# Altium PCB Microcontroller PCB.PcbDoc (part 1 of 2)
Units mm, origin at the board's own origin, x right, y up, seen from the top; angles counter-clockwise.
Board outline 155 x 69 mm, 2 copper layers (Top Layer, Bottom Layer), stack 1.6 mm thick; 87 components, 109 nets, 469 pads, 119 vias.
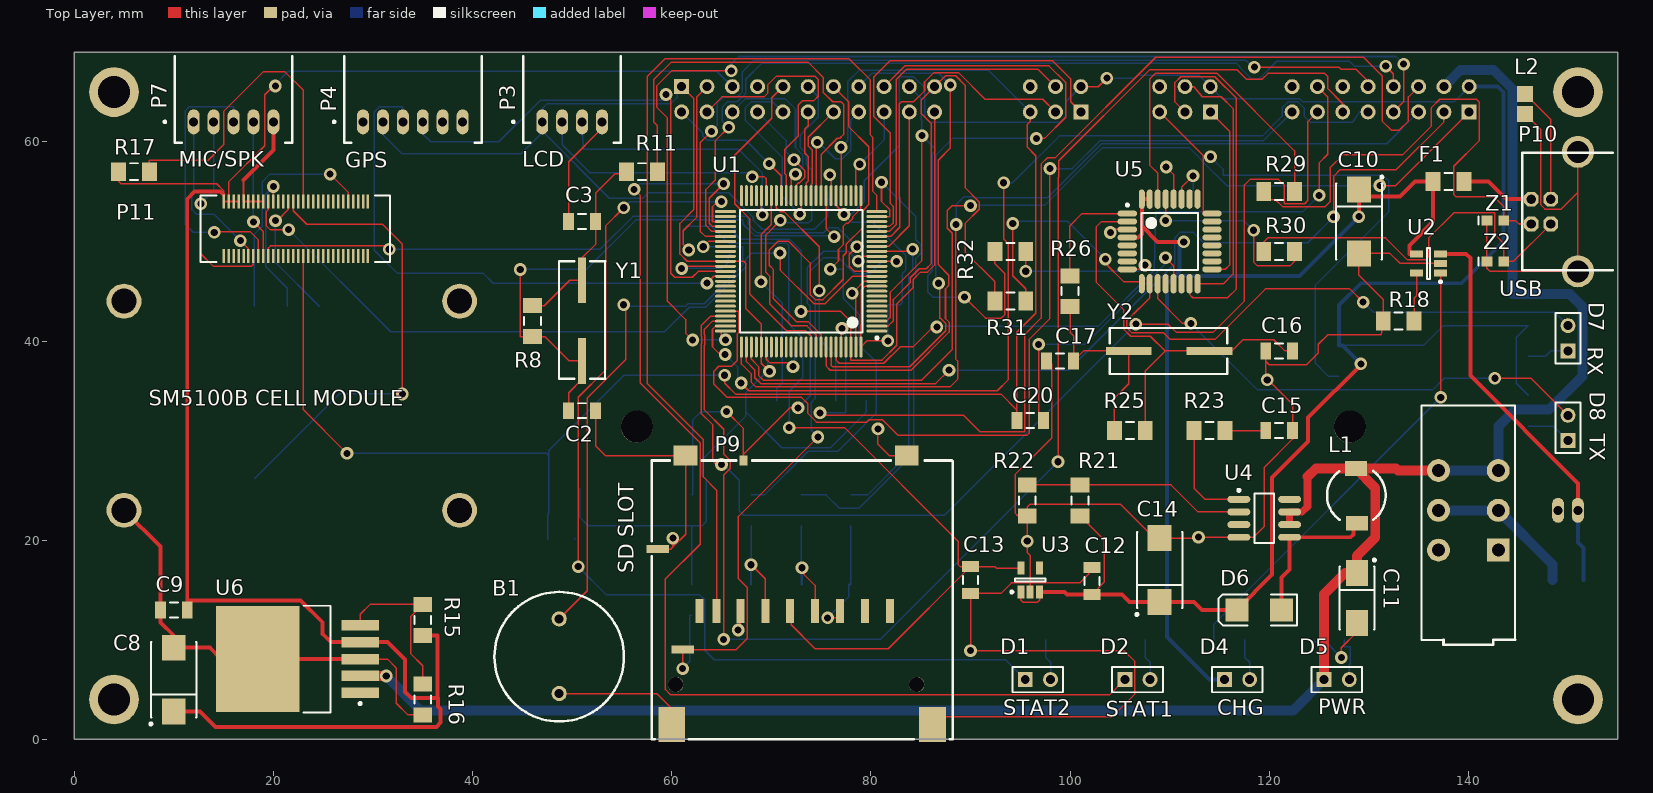
[diagram p0: Top Layer view]
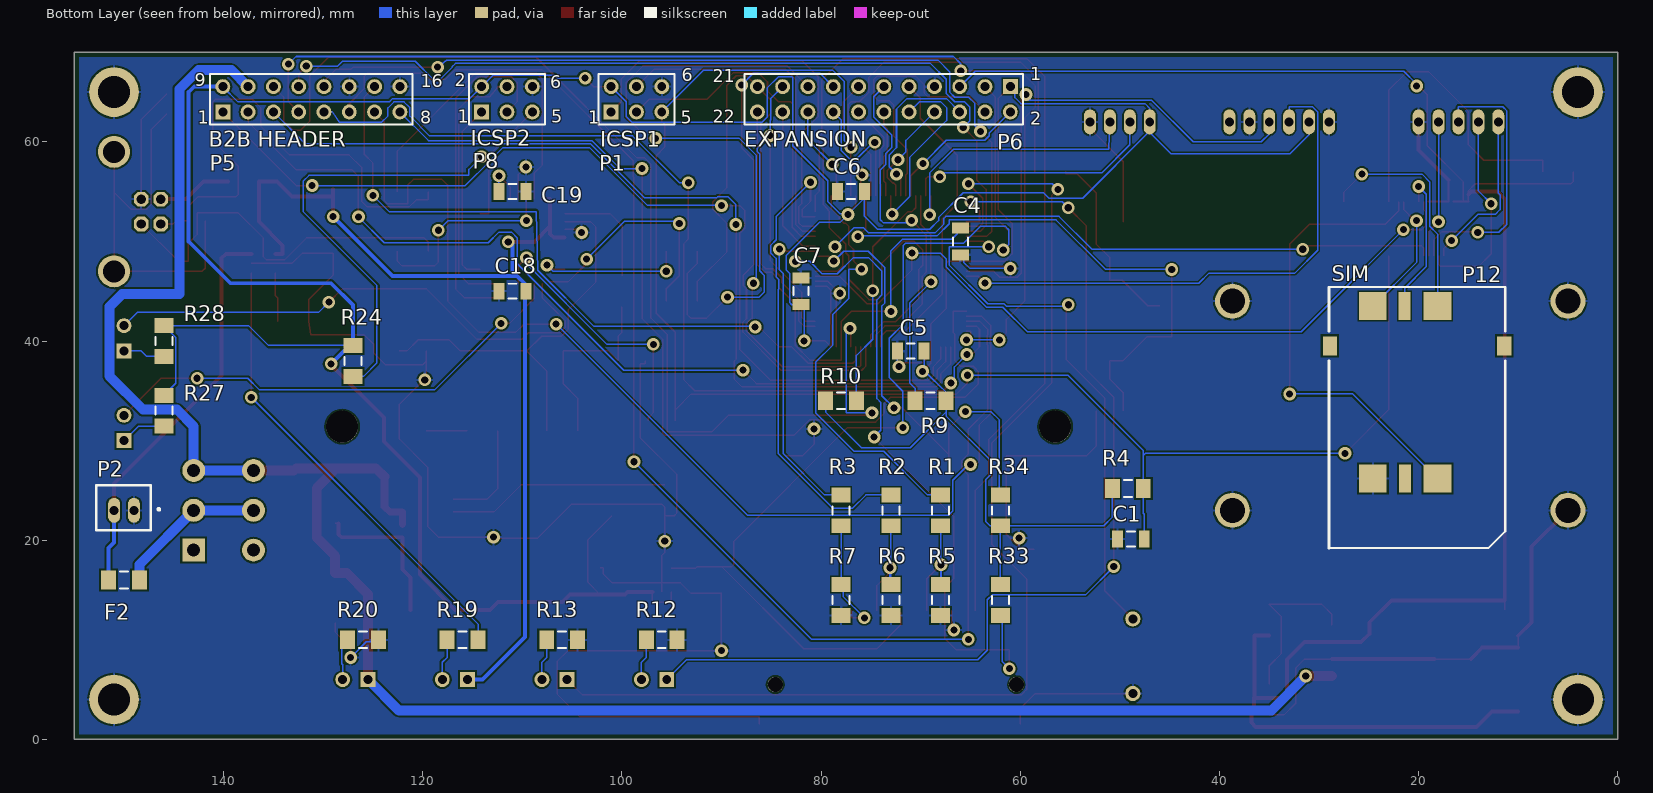
[diagram p1: Bottom Layer view, seen from below]

## Layer stack, top to bottom
Top Layer: signal copper 0.1
Dielectric: core 1.4, FR-4, Dk 4.8
Bottom Layer: signal copper 0.1

## Board outline
0,69 155,69 155,0 0,0 0,69

## Design rules (kind name [scope] priority, off if disabled: settings)
Clearance [All] p1: gap=0.18
HoleSize [All] p1: absolutevalues=TRUE maxlimit=5 minlimit=0.025 maxpercent=80.000 minpercent=20.000
MinimumSolderMaskSliver [All] p1 off: minsoldermaskwidth=0.05
PolygonConnect [All] p1: connectstyle=Relief reliefconductorwidth=0.254 reliefentries=4 polygonreliefangle="90 Angle"
RoomDefinition "Arduino Board" [InComponentClass('Arduino Board')] p1 off: confinementstyle=ConfineIn formatcopy=TRUE lockcomponents=FALSE outline 0,0 155,0 155,69 0,69
RoomDefinition "Power Circuits" [InComponentClass('Power Circuits')] p2 off: confinementstyle=ConfineIn formatcopy=TRUE lockcomponents=FALSE outline 0,0 155,0 155,69 0,69
RoomDefinition "Cell Phone Module" [InComponentClass('Cell Phone Module')] p3 off: confinementstyle=ConfineIn formatcopy=TRUE lockcomponents=FALSE outline 0,0 155,0 155,69 0,69
RoomDefinition "USB Host" [InComponentClass('USB Host')] p4 off: confinementstyle=ConfineIn formatcopy=TRUE lockcomponents=FALSE outline 0,0 155,0 155,69 0,69
RoutingVias [All] p1: holewidth=0.711 width=1.27 viastyle="Through Hole" minholewidth=0.711 minwidth=1.27 maxholewidth=0.711 maxwidth=1.27
SMDNeckDown SMDNeckDown_1 [InNet('BATT_SW')] p1: percent=100.000
SMDNeckDown [InNet('BATT_IN')] p2: percent=100.000
SilkToSilkClearance [All] p1: silktosilkclearance=0.152
SilkscreenOverComponentPads [All] p1: minsilkscreentomaskgap=0.152
SolderMaskExpansion [All] p1: expansion=0.102
Width Width_4 [(InNet('BATT_SW') AND InComponent('U1'))] p1: maxlimit=0.152 minlimit=0.152 preferedwidth=0.152
Width Width_3 [InNet('BATT_SW')] p2: maxlimit=1 minlimit=0.7 preferedwidth=1 minimp=50.000000 maximp=50.000000 favimp=50.000000
Width Width_2 [InNet('BATT_IN')] p3: maxlimit=1 minlimit=1 preferedwidth=1 minimp=50.000000 maximp=50.000000 favimp=50.000000
Width Width_1 [(InNet('USB_VCC') OR InNet('USB_VCC_FUSED') OR InNet('BATT_CHG'))] p4: maxlimit=0.4 minlimit=0.4 preferedwidth=0.4 minimp=50.000000 maximp=50.000000 favimp=50.000000
Width [All] p5: maxlimit=1 minlimit=0.152 preferedwidth=0.152 minimp=50.000000 maximp=50.000000 favimp=50.000000
24 further rules are at their usual default settings.

## Classes and differential pairs
component class "Arduino Board": B1 C1 C2 C3 C4 C5 C6 C7 D1 D2 P1 P3 P4 P5 p6 P9 R1 R2 R3 R4 R5 R6 R7 R8 R9 R10 R11 R12 R13 R33 R34 U1 Y1
component class "Cell Phone Module": C8 C9 P7 P11 P12 R15 R16 R17 U6
component class "Power Circuits": C10 C11 C12 C13 C14 C15 D4 D5 D6 F1 F2 L1 P2 R18 R19 R20 R21 R22 R23 U2 U3 U4
component class "USB Host": C16 C17 C18 C19 C20 D7 D8 L2 P8 P10 R24 R25 R26 R27 R28 R29 R30 R31 R32 U5 Y2 Z1 Z2

## Components (designator, comment, footprint, x,y, rotation, side; value= is the part's Value field where it differs from the comment)
B1 "Buzzer" BUZZER 48.7,12.1 r270 top
C1 "Cap Semi" C1206 48.9,20.1 r180 bottom
C2 "Cap Semi" C1206 51,33 r180 top
C3 "Cap Semi" C1206 51,52 r180 top
C4 "Cap Semi" C1206 66,50 r90 bottom
C5 "Cap Semi" C1206 71,39 r180 bottom
C6 "Cap Semi" C1206 77,55 r180 bottom
C7 "Cap Semi" C1206 82,45 r270 bottom
C8 "Cap Pol3" TC7343-2917 10,6 r90 top
C9 "Cap Semi" C1206 10,13 r0 top
C10 "Cap Pol3" TC7343-2917 129,52 r270 top
C11 "Cap Pol3" TC6032-2412 128.8,14.2 r270 top
C12 "Cap Semi" C1206 102.2,15.9 r270 top
C13 "Cap Semi" C1206 90,16 r90 top
C14 "Cap Pol3" TC7343-2917 109,17 r90 top
C15 "Cap Semi" C1206 121,31 r180 top
C16 "Cap Semi" C1206 121,39 r0 top
C17 "Cap Semi" C1206 99,38 r180 top
C18 "Cap Semi" C1206 111,45 r180 bottom
C19 "Cap Semi" C1206 111,55 r0 bottom
C20 "Cap Semi" C1206 96,32 r180 top
D1 "STAT1" HDR1X2 95.5,6 r0 top
D2 "STAT2" HDR1X2 105.5,6 r0 top
D4 "CHARGING" HDR1X2 115.5,6 r0 top
D5 "POWER" HDR1X2 125.5,6 r0 top
D6 "10BQ015" DSO-C2/X2.3 119,13 r180 top
D7 "RX" HDR1X2 150,39 r90 top
D8 "TX" HDR1X2 150,30 r90 top
F1 "500mA" RESC3216M 138,56 r180 top
F2 "3A" RESC3216M 150,16 r180 bottom
L1 "Inductor" "MURATA SMT INDUCTOR" 128.8,21.7 r0 top
L2 "Inductor" INDC2012M 145.7,63.8 r90 top
P1 "ICSP1" HDR2X3 101.08,63 r180 bottom
P2 "BATT_IN" "2MM JST PH - 2 PIN VERT" 149,23 r270 bottom
P3 "LCD" "2MM JST PH - 4 PIN" 50,62 r90 top
P4 "GPS" "2mm JST PH - 6 pin" 32,62 r90 top
P5 "B2B CONNECTOR" HDR2X8_CEN 140.08,63 r180 bottom
P6 "EXPANSION" HDR2X11 61,65.54 r0 bottom (schematic designator P?)
P7 "CELL_SPK_MIC" "2mm JST PH - 5 pin" 15,62 r90 top
P8 "ICSP2" HDR2X3 114.08,63 r180 bottom locked
P9 "SDCARD" SDSLOT 72.5,0 r180 top
P10 "USB" "USB-B PN61729" 151,53 r90 top
P11 "SM5100B" SM5100B-60PIN 5,44 r0 top
P12 "SIMCARD" SIMSLOT 30,45 r180 bottom
R1 "Res3" RESC3216M 68,23 r90 bottom
R2 "Res3" RESC3216M 73,23 r90 bottom
R3 "Res3" RESC3216M 78,23 r90 bottom
R4 "Res3" RESC3216M 49.2,25.2 r0 bottom
R5 "Res3" RESC3216M 68,14 r90 bottom
R6 "Res3" RESC3216M 73,14 r90 bottom
R7 "Res3" RESC3216M 78,14 r90 bottom
R8 "Res3" RESC3216M 46,42 r270 top
R9 "Res3" RESC3216M 69,34 r180 bottom
R10 "Res3" RESC3216M 78,34 r0 bottom
R11 "Res3" RESC3216M 57,57 r180 top
R12 "Res3" RESC3216M 96,10 r0 bottom
R13 "Res3" RESC3216M 106,10 r0 bottom
R15 "Res3" RESC3216M 35,12 r270 top
R16 "Res3" RESC3216M 35,4 r90 top
R17 "Res3" RESC3216M 6,57 r0 top
R18 "Res3" RESC3216M 133,42 r0 top
R19 "Res3" RESC3216M 116,10 r180 bottom
R20 "Res3" RESC3216M 126,10 r0 bottom
R21 "Res3" RESC3216M 101,24 r270 top
R22 "Res3" RESC3216M 95.7,24 r90 top
R23 "Res3" RESC3216M 114,31 r180 top
R24 "Res3" RESC3216M 127,38 r90 bottom
R25 "Res3" RESC3216M 106,31 r0 top
R26 "Res3" RESC3216M 100,45 r270 top
R27 "Res3" RESC3216M 146,33 r90 bottom
R28 "Res3" RESC3216M 146,40 r90 bottom
R29 "Res3" RESC3216M 121,55 r0 top
R30 "Res3" RESC3216M 121,49 r0 top
R31 "Res3" RESC3216M 94,44 r0 top
R32 "Res3" RESC3216M 94,49 r0 top
R33 "Res3" RESC3216M 62,14 r90 bottom
R34 "Res3" RESC3216M 62,23 r270 bottom
U1 "ATmega2560" TSQFP50P1600X1600-100M 73,47 r180 top
U2 "MCP73831" SOT23-5AM 136,47.8 r180 top
U3 "LP2985" SOT23-5AM 96,16 r90 top
U4 "LT1308" SOIC127P600-8AM 119.5,22.2 r0 top
U5 "ATmega8U2" QFP80P900X900-32M 110,50 r0 top
U6 "SPX29302" TO170P1520-6N 22.416,8.066 r180 top
Y1 "16MHz" "SMT Crystal" 51,38 r180 top
Y2 "16MHz" "SMT Crystal" 114,39 r270 top
Z1 "Tranzorb" CD1608-0603 142.7,52.1 r180 top
Z2 "Tranzorb" CD1608-0603 142.7,48 r180 top

## Footprints (in the part's own frame and the unit in brackets; to place one, negate y for a bottom-side part, rotate by r counter-clockwise, add the part's x,y. Pads: shape width x height; smd on the part's side, far side on the other; paste and mask are expansions set on the pad)
"2MM JST PH - 2 PIN VERT" [mm]
  oval 2.5x1.2 hole 0.9: 1(0,0) 2(0,-2)
  silkscreen extent -2.5,-3.8 2,2.6, body extent -2.5,-3.8 2,1.7, height 8
"2MM JST PH - 4 PIN" [mm]
  oval 2.5x1.2 hole 0.9: 1(0,3) 2(0,1) 3(0,-1) 4(0,-3)
  silkscreen extent -2.1,-4.9 6.6,6, body extent -2.1,-4.9 6.6,4.9, height 5
"2mm JST PH - 5 pin" [mm]
  oval 2.5x1.2 hole 0.9: 1(0,3) 2(0,1) 3(0,-1) 4(0,-3) 5(0,-5)
  silkscreen extent -2.1,-6.9 6.6,6, body extent -2.1,-6.9 6.6,4.9, height 5
"2mm JST PH - 6 pin" [mm]
  oval 2.5x1.2 hole 0.9: 1(0,3) 2(0,1) 3(0,-1) 4(0,-3) 5(0,-5) 6(0,-7)
  silkscreen extent -2.1,-8.9 6.6,6, body extent -2.1,-8.9 6.6,4.9, height 5
BUZZER [mil] "Piezon Buzzer 458-1066-ND"
  round 60 hole 35.43: 1(0,0) 2(295.28,0)
  silkscreen extent -106,-256 406,256, body extent -77,-236 394,236, height 197
C1206 [mm] "Chip Capacitor, Body 3.2x1.6mm, IPC High Density"
  rect 1.1x1.7 smd: 1(-1.35,0) 2(1.35,0)
  silkscreen extent -0.4,-0.75 0.4,0.75, body extent -1.7,-0.9 1.7,0.9, height 1.3
CD1608-0603 [mm] "Chip Diode; Body 1.6 x 0.8 mm (LxW typ)"
  rect 1.1x1 smd: 1(-0.85,0) 2(0.85,0)
  silkscreen extent 1.7,-0.4 1.7,0.4
DSO-C2/X2.3 [mm] "DO-214-AA/SMB; 2 C-Bend Leads; Body 5.3 x 3.6 mm, inc. leads (LxW)"
  rect 2.3x2.3 smd: 1(-2.25,0) 2(2.25,0)
  silkscreen extent -3.8,-1.55 4.1,1.55
HDR1X2 [mm] "Connector; Header; 2 Position"
  rect 1.5x1.5 hole 0.9: 1(0,0)
  round 1.5 hole 0.9: 2(2.54,0)
  silkscreen extent -1.27,-1.27 3.81,1.27
HDR2X3 [mm] "Connector; Header; 3x2 Position"
  rect 1.5x1.5 hole 0.9: 1(0,0)
  round 1.5 hole 0.9: 2(0,2.54) 3(2.54,0) 4(2.54,2.54) 5(5.08,0) 6(5.08,2.54)
  silkscreen extent -1.27,-1.27 6.35,3.81
HDR2X8_CEN [mm] "Connector; Header; 8x2 Position"
  rect 1.5x1.5 hole 0.9: 1(0,0)
  round 1.5 hole 0.9: 2(2.54,0) 3(5.08,0) 4(7.62,0) 5(10.16,0) 6(12.7,0) 7(15.24,0) 8(17.78,0) 9(0,2.54) 10(2.54,2.54) 11(5.08,2.54) 12(7.62,2.54) 13(10.16,2.54) 14(12.7,2.54) 15(15.24,2.54) 16(17.78,2.54)
  silkscreen extent -1.27,-1.27 19.05,3.81
HDR2X11 [mm] "Connector; Header; 11x2 Position"
  rect 1.5x1.5 hole 0.9: 1(0,0)
  round 1.5 hole 0.9: 2(0,2.54) 3(2.54,0) 4(2.54,2.54) 5(5.08,0) 6(5.08,2.54) 7(7.62,0) 8(7.62,2.54) 9(10.16,0) 10(10.16,2.54) 11(12.7,0) 12(12.7,2.54) 13(15.24,0) 14(15.24,2.54) 15(17.78,0) 16(17.78,2.54) 17(20.32,0) 18(20.32,2.54) 19(22.86,0) 20(22.86,2.54) 21(25.4,0) 22(25.4,2.54)
  silkscreen extent -1.27,-1.27 26.67,3.81
INDC2012M [mm] "Chip Inductor, Body 2.0x1.2mm, IPC Low Density"
  rect 1.6x1.6 smd: 1(-1,0) 2(1,0)
  body extent -1.1,-0.7 1.1,0.7, height 1.1
"MURATA SMT INDUCTOR" [mm]
  rect 2.2x1.5 smd: 1(-0.1,5.5) 2(0,0)
  silkscreen extent -3,0.35 2.9,5.25, body extent -2.98,0.01 3,5.99, height 2
QFP80P900X900-32M [mm] "32-Pin Quad Flat Pack 0.8 mm Pitch"
  oval 1.95x0.6 smd: 1(-4.25,2.8) 2(-4.25,2) 3(-4.25,1.2) 4(-4.25,0.4) 5(-4.25,-0.4) 6(-4.25,-1.2) 7(-4.25,-2) 8(-4.25,-2.8) 17(4.25,-2.8) 18(4.25,-2) 19(4.25,-1.2) 20(4.25,-0.4) 21(4.25,0.4) 22(4.25,1.2) 23(4.25,2) 24(4.25,2.8)
  oval 0.6x1.95 smd: 9(-2.8,-4.25) 10(-2,-4.25) 11(-1.2,-4.25) 12(-0.4,-4.25) 13(0.4,-4.25) 14(1.2,-4.25) 15(2,-4.25) 16(2.8,-4.25) 25(2.8,4.25) 26(2,4.25) 27(1.2,4.25) 28(0.4,4.25) 29(-0.4,4.25) 30(-1.2,4.25) 31(-2,4.25) 32(-2.8,4.25)
  silkscreen extent -4.37,-2.85 2.85,3.77, body extent -3.5,-3.5 3.5,3.5, height 1.7
RESC3216M [mm] "Chip Resistor, Body 3.2x1.6mm, IPC Low Density"
  rect 1.5x1.9 smd: 1(-1.55,0) 2(1.55,0)
  silkscreen extent -0.4,-0.85 0.4,0.85, body extent -1.68,-0.87 1.68,0.87, height 0.71
SDSLOT [mm]
  rect 0.8x2.4 smd: 1(-6.9,-12.9) 2(-4.4,-12.9) 3(-1.9,-12.9) 4(0.6,-12.9) 5(3.1,-12.9) 6(5.6,-12.9) 7(8,-12.9) 8(9.7,-12.9) 9(-9.4,-12.9)
  rect 0.8x1 smd: CD(5.3,-28)
  rect 2.25x0.8 smd: COM(13.9,-19.1) WP(11.4,-9)
  rect 2.7x3.5 smd: S1(-13.7,-1.5) S2(12.5,-1.5)
  rect 2.4x2 smd: S3(-11.1,-28.5) S4(11.1,-28.5)
  round 1.524 hole 1.5 unplated: ""(-12.1,-5.5) ""(12.1,-5.5)
  silkscreen extent -15.7,-28 14.5,0, body extent -15.7,-28 14.5,6.3, height 2.7
SIMSLOT [mm] "6-pin molex 1.9mm sim reader 0473880001"
  rect 2.8x2.8 smd: 1(11.9,-1.5) 3(5.4,-1.5) 4(11.88,-18.8) 6(5.4,-18.8)
  rect 1.2x2.8 smd: 2(8.6,-1.5) 5(8.64,-18.8)
  rect 1.45x1.95 smd: S1(1.1,-5.5) S2(18.6,-5.5)
  silkscreen extent 1,-25.8 18.7,0.4, body extent 1,-25.8 18.7,0.4, height 1.5
SM5100B-60PIN [mm]
  rect 0.25x1.4 smd: 1(10,10) 2(10,4.539) 3(10.5,10) 4(10.5,4.539) 5(11,10) 6(11,4.539) 7(11.5,10) 8(11.5,4.539) 9(12,10) 10(12,4.539) 11(12.5,10) 12(12.5,4.539) 13(13,10) 14(13,4.539) 15(13.5,10) 16(13.5,4.539) 17(14,10) 18(14,4.539) 19(14.5,10) 20(14.5,4.539) 21(15,10) 22(15,4.539) 23(15.5,10) 24(15.5,4.539) 25(16,10) 26(16,4.539) 27(16.5,10) 28(16.5,4.539) 29(17,10) 30(17,4.539) 31(17.5,10) 32(17.5,4.539) 33(18,10) 34(18,4.539) 35(18.5,10) 36(18.5,4.539) 37(19,10) 38(19,4.539) 39(19.5,10) 40(19.5,4.539) 41(20,10) 42(20,4.539) 43(20.5,10) 44(20.5,4.539) 45(21,10) 46(21,4.539) 47(21.5,10) 48(21.5,4.539) 49(22,10) 50(22,4.539) 51(22.5,10) 52(22.5,4.539) 53(23,10) 54(23,4.539) 55(23.5,10) 56(23.5,4.539) 57(24,10) 58(24,4.539) 59(24.5,10) 60(24.5,4.539)
  round 3.5 hole 2.5: S1(0,0) S2(33.7,0) S3(0,-21) S4(33.7,-21)
  silkscreen extent 7.7,3.94 26.7,10.64, body extent 0,-27 34,11, height 3
"SMT Crystal" [mm]
  rect 0.8x4.6 smd: 1(0,-8.1) 2(0,0)
  silkscreen extent -2.3,-10 2.3,1.8, body extent -2.3,-10 2.3,1.8, height 3
SOIC127P600-8AM [mm] "SOIC, 8-Leads, Body 4.9x3.9mm, Pitch 1.27mm, IPC Low Density"
  oval 2.3x0.7 smd: 1(-2.55,1.905) 2(-2.55,0.635) 3(-2.55,-0.635) 4(-2.55,-1.905) 5(2.55,-1.905) 6(2.55,-0.635) 7(2.55,0.635) 8(2.55,1.905)
  silkscreen extent -2.67,-2.5 1,2.93, body extent -2,-2.5 2,2.5, height 2.72
SOT23-5AM [mm] "SOT23, 5-Leads, Body 2.9x1.7mm, Pitch 0.95mm, Lead Span 2.8mm, IPC Low Density"
  rect 1.3x0.7 smd: 1(-1.2,0.95) 2(-1.2,0) 3(-1.2,-0.95) 4(1.2,-0.95) 5(1.2,0.95)
  silkscreen extent -1.33,-1.55 0.15,1.97, body extent -0.9,-1.55 0.9,1.55, height 1.45
TC6032-2412 [mm] "Capacitor, SM Tantalum; Body 6.0 x 3.2 mm (LxW typ)"
  rect 2.6x2.2 smd: 1(-2.5,0) 2(2.5,0)
  silkscreen extent -3.92,-1.75 3.15,1.88
TC7343-2917 [mm] "Capacitor, SM Tantalum; Body 7.3 x 4.3 mm (LxW typ)"
  rect 2.6x2.4 smd: 1(-3.2,0) 2(3.2,0)
  silkscreen extent -4.57,-2.3 3.8,2.42
TO170P1520-6N [mm] "D2-PAK, 6-Leads, Body 9x10.2mm, Pitch 1.7mm, Lead Span 15.2mm, IPC Medium Density"
  rect 3.8x1.05 smd: 1(-6.3,3.4) 2(-6.3,1.7) 3(-6.3,0) 4(-6.3,-1.7) 5(-6.3,-3.4)
  rect 8.4x10.65 smd: 6(4,0)
  silkscreen extent -6.43,-5.35 -0.6,5.35, body extent -3.3,-5.33 6.35,5.33, height 4.83
TSQFP50P1600X1600-100M [mm] "Thin QFP, 100-Leads, Body 14x14mm, Pitch 0.5mm, IPC Low Density"
  oval 2.1x0.3 smd: 1(-7.6,6) 2(-7.6,5.5) 3(-7.6,5) 4(-7.6,4.5) 5(-7.6,4) 6(-7.6,3.5) 7(-7.6,3) 8(-7.6,2.5) 9(-7.6,2) 10(-7.6,1.5) 11(-7.6,1) 12(-7.6,0.5) 13(-7.6,0) 14(-7.6,-0.5) 15(-7.6,-1) 16(-7.6,-1.5) 17(-7.6,-2) 18(-7.6,-2.5) 19(-7.6,-3) 20(-7.6,-3.5) 21(-7.6,-4) 22(-7.6,-4.5) 23(-7.6,-5) 24(-7.6,-5.5) 25(-7.6,-6) 51(7.6,-6) 52(7.6,-5.5) 53(7.6,-5) 54(7.6,-4.5) 55(7.6,-4) 56(7.6,-3.5) 57(7.6,-3) 58(7.6,-2.5) 59(7.6,-2) 60(7.6,-1.5) 61(7.6,-1) 62(7.6,-0.5) 63(7.6,0) 64(7.6,0.5) 65(7.6,1) 66(7.6,1.5) 67(7.6,2) 68(7.6,2.5) 69(7.6,3) 70(7.6,3.5) 71(7.6,4) 72(7.6,4.5) 73(7.6,5) 74(7.6,5.5) 75(7.6,6)
  oval 0.3x2.1 smd: 26(-6,-7.6) 27(-5.5,-7.6) 28(-5,-7.6) 29(-4.5,-7.6) 30(-4,-7.6) 31(-3.5,-7.6) 32(-3,-7.6) 33(-2.5,-7.6) 34(-2,-7.6) 35(-1.5,-7.6) 36(-1,-7.6) 37(-0.5,-7.6) 38(0,-7.6) 39(0.5,-7.6) 40(1,-7.6) 41(1.5,-7.6) 42(2,-7.6) 43(2.5,-7.6) 44(3,-7.6) 45(3.5,-7.6) 46(4,-7.6) 47(4.5,-7.6) 48(5,-7.6) 49(5.5,-7.6) 50(6,-7.6) 76(6,7.6) 77(5.5,7.6) 78(5,7.6) 79(4.5,7.6) 80(4,7.6) 81(3.5,7.6) 82(3,7.6) 83(2.5,7.6) 84(2,7.6) 85(1.5,7.6) 86(1,7.6) 87(0.5,7.6) 88(0,7.6) 89(-0.5,7.6) 90(-1,7.6) 91(-1.5,7.6) 92(-2,7.6) 93(-2.5,7.6) 94(-3,7.6) 95(-3.5,7.6) 96(-4,7.6) 97(-4.5,7.6) 98(-5,7.6) 99(-5.5,7.6) 100(-6,7.6)
  silkscreen extent -7.73,-6.15 6.15,6.82, body extent -7,-7 7,7, height 1.6
"USB-B PN61729" [mm]
  oct 1.458x1.458 hole 0.95: 1(1.25,4.71) 2(-1.25,4.71) 3(-1.25,2.71) 4(1.25,2.71)
  round 3.216 hole 2.2: S1(-6,0) S2(6,0)
  silkscreen extent -5.9,-3.5 5.9,5.6, body extent -5.9,-10.2 5.9,5.6, height 11.2

## Part data
B1: "Magnetic Transducer Buzzer"
C1 C2 C3 C4 C5 C6 C7 C9 C12 C13 C15 C16 C17 C18 C19 C20: "Capacitor (Semiconductor SIM Model)"
C8 C10 C11 C14: "Polarized Capacitor (Surface Mount)"
D1 D2 D4 D5 D7 D8: library part LED3, "Typical BLUE SiC LED"
D6: library part Diode, "Default Diode"
F1 F2: library part "Fuse 2", "Fuse"
P1 P8: library part "Header 3X2", "Header, 3-Pin, Dual row"
P2: library part "Header 2", "Header, 2-Pin"
P3: library part "Header 4", "Header, 4-Pin"
P4: library part "Header 6", "Header, 6-Pin"
P5: library part "Header 8X2A", "Header, 8-Pin, Dual row"
P6: library part "Header 11X2", "Header, 11-Pin, Dual row"
P7: library part "Header 5", "Header, 5-Pin"
P9: library part SDSLOT
P12: library part SIMHOLDER
R1 R2 R3 R4 R5 R6 R7 R8 R9 R10 R11 R12 R13 R15 R16 R17 R18 R19 R20 R21 R22 R23 R24 R25 R26 R27 R28 R29 R30 R31 R32 R33 R34: "Resistor"
Y1 Y2: library part XTAL, "Crystal Oscillator"
Z1 Z2: "Transient Voltage Suppression (TVS) Diode"

## Free pads (board coordinates)
  round 5 hole 3.2: 0(3.999,3.998) 0(3.999,64.998) 0(150.999,3.998) 0(150.999,64.998)
  round 3.2 hole 3.2 unplated: 0(56.5,31.4) 0(128.1,31.4)
  round 2.3 hole 1.3: D(137,23) D(143,23) S1(137,19) S2(137,27) S2(143,27)
  rect 2.3x2.3 hole 1.3: S1(143,19)

## Via types
v1: diameter 1.27, hole 0.711, Top Layer to Bottom Layer, 119 vias

## Nets (pads, with @x,y where several pads share a name; then routed paths per layer and width w, separated by ;. In a path a pad name is that pad's centre, name@x,y a point inside that pad or via, vN(x,y) a via of type N, cw(c..) or ccw(c..) an arc to the next point about the centre after c; other vN are vias at no path point)
+3.3V: C13.2 P6.3 P9.4 U3.5 | length 105.2
  Top Layer w0.152: v1(61.71,49.138) 61.149,49.699 61.149,51.068 62.534,52.453 62.534,64.534 P6.3@63.54,65.54 ; v1(71.792,31.303) 77.36,31.303 88.761,19.902 88.761,17.553 88.964,17.35 C13.2@90,17.35 ; P9.4@72.232,12.9 72,12.668 72,11.5 74.4,9.1 81.75,9.1 C13.2@90,17.35 ; U3.5@95.05,17.2 92.594,17.2 92.444,17.35 C13.2@90,17.35
  Bottom Layer w0.152: v1(61.71,49.138) 61.149,49.699 61.149,51.17 61.479,51.5 64.021,51.5 65.723,49.798 71.54,49.798 71.77,49.568 71.77,41.668 73.165,40.273 73.165,36.336 71.792,34.963 v1(71.792,31.303)
+3.8V: C8.1 C9.2 P6.5 P11.1 P11.3 P11.5 P11.7 R15.2 R17.1 U6.4 | length 190.8
  Top Layer w0.152: R17.1@4.45,57 4.45,56.047 4.704,55.793 14.314,55.793 15,55.107 P11.1@15,54 ; C9.2@11.35,13 11.35,13.942 ; P11.3@15.5,54 15.5,55.97 19.139,59.61 19.139,64.733 20.2,65.794 v1(20.2,65.6)
  Top Layer w0.2: P11.1@15,54 P11.3@15.5,54 P11.7@16.5,54
  Top Layer w0.4: C8.1@10,2.8 12.645,2.8 14.186,1.259 36.359,1.259 36.8,1.7 36.8,3.029 36.525,3.304 36.525,4.129 36.5,4.129 ; P11.1@15,54.689 14.689,55 12.1,55 11.35,54.25 11.35,13.942 22.738,13.942 24.956,11.724 24.956,10.579 25.769,9.766 U6.4@28.716,9.766 31.46,9.766 33.2,8.026 33.2,4.775 33.846,4.129 36.5,4.129 ; R15.2@35,10.45 36.5,10.45 36.5,4.129
  Bottom Layer w0.152: v1(20.2,65.6) 20.2,65.794 21.502,67.096 64.524,67.096 P6.5@66.08,65.54
+5V: C5.2 C6.2 C7.2 C12.2 C14.1 D6.2 P1.2 P3.1 P4.2 P5.9 P6.1 P8.2 R4.2 R9.2 R10.2 R21.2 R24.2 R27.2 R28.2 R33.2 R34.2 U1.10 U1.31 U1.61 U1.80 U1.100 U3.1 U3.3 | length 423.1
  Top Layer w0.152: P6.1@61,65.54 62.202,64.338 62.202,53.194 60.817,51.809 60.817,48.731 61.548,48 67.222,48 67.456,47.765 67.456,43.239 69,41.695 69,37.759 v1(69.813,36.946) ; U1.31@76.5,54.6 76.5,53.67 76.594,53.576 76.594,53.532 76.832,53.294 76.876,53.294 v1@77.382,52.788 ; U1.10@80.6,45.5 79.414,45.5 79.011,45.097 79.011,41.666 79,41.655 U1.100@79,39.4 79.619,40.019 v1(81.7,40.019) ; U3.1@95.05,14.8 95.05,13.984 95.253,13.781 96.747,13.781 96.95,13.984 U3.3@96.95,14.8 ; R21.2@101,22.45 103.417,20.033 103.417,15.767 C12.2@102.2,14.55 ; P1.2@101.08,65.54 102.84,65.54 v1(103.7,66.4)
  Top Layer w0.4: U3.3@96.95,14.8 99.429,14.8 99.679,14.55 C12.2@102.2,14.55 105.22,14.55 105.97,13.8 C14.1@109,13.8 112.459,13.8 113.259,13 D6.2@116.75,13 120.282,16.532 120.282,26.282 122.33,28.33 123.9,29.9 123.9,32.3 v1@129.3,37.7
  Bottom Layer w0.152: P4.2@31,62 31,60.72 32.92,58.8 44.851,58.8 47,60.949 P3.1@47,62 ; R4.2@50.75,25.2 50.75,22.315 51.615,21.45 R34.2@62,21.45 ; P6.1@61,65.54 60.534,65.074 60.534,64.446 59.93,63.842 47.481,63.842 47,63.362 P3.1@47,62 ; R33.2@62,15.55 R34.2@62,21.45 ; C5.2@69.65,39 v1@69.65,36.946 ; v1(69.813,36.946) v1@69.65,36.946 ; C6.2@75.65,55 C6.2@75.65,54.35 ; R10.2@79.55,34 79.55,32.882 75.941,29.273 71.059,29.273 67.45,32.882 ; v1(81.7,40.019) 81.7,43.65 C7.2@82,43.65 82.943,43.65 83.147,43.855 83.147,46.774 83.48,47.106 83.48,48.602 80.176,51.906 78.094,51.906 v1@77.2,52.8 ; P1.2@101.08,65.54 99.562,64.022 99.562,62.549 99.003,61.99 85.916,61.99 85.394,62.512 85.394,65.442 84.29,66.546 82.919,66.546 82.843,66.47 82.843,59.603 79.337,56.097 79.337,54.015 78.123,52.8 v1@77.2,52.8 ; v1(103.7,66.4) 106.5,66.4 106.8,66.7 112.92,66.7 P8.2@114.08,65.54 115.282,64.338 123.032,64.338 123.364,64.006 138.546,64.006 P5.9@140.08,65.54 ; R24.2@126.81,39.55 R24.2@127,39.55 ; R24.2@127.35,39.55 135.497,39.55 137.497,41.55 R28.2@146,41.55 144.793,40.343 144.793,35.757 R27.2@146,34.55 ; P3.1@47,62 47.063,61.012 53.733,54.343 57.121,54.343 57.659,54.88 65.721,54.88 68.2,52.401 68.2,52.1 69.083,51.217 74.33,51.217 75.65,52.537 C6.2@75.65,54.35 ; R34.2@62,21.45 63.027,21.45 63.486,21.909 63.486,26.074 62.998,26.562 62.998,28.027 67.45,32.479 67.45,32.882 ; 67.45,32.882 R9.2@67.45,34 R9.2@67.45,34.874 ; R9.2@67.45,34.874 v1@69.65,36.946 ; R9.2@67.45,34.874 69.522,36.946 v1@69.65,36.946 ; C6.2@75.65,54.35 v1@77.2,52.8
  Bottom Layer w0.4: v1(129.2,37.7) 127.35,39.55 R24.2@127,39.55 127,43.6 129.2,45.8 139.3,45.8 143.5,50 143.5,64.985 142.945,65.54 P5.9@140.08,65.54
  other v1: 77.3,52.7
ADC3: P6.17 U1.94 | length 70.9
  Top Layer w0.152: U1.94@76,39.4 76,37.555 76.131,37.425 83.906,37.425 87.512,41.031 87.512,41.769 86.99,42.291 86.911,42.291 86.9,42.302 86.9,45.7 v1(86.8,45.8) ; P6.17@81.32,65.54 83.403,67.623 97.885,67.623 99.556,65.953 99.556,62.473 97.422,60.339 v1(96.609,60.339)
  Bottom Layer w0.152: v1@86.5,45.7 86.5,58.637 88.202,60.339 v1(96.609,60.339)
ADC4: P6.15 U1.93 | length 52.3
  Top Layer w0.152: U1.93@75.5,39.4 75.5,37.496 75.923,37.073 84.023,37.073 87.844,40.893 87.844,41.907 87.491,42.26 87.491,45.231 87.823,45.563 87.823,46.607 86.754,47.675 86.754,58.155 87.973,59.374 v1(87.973,65.708)
  Bottom Layer w0.152: P6.15@78.78,65.54 80.118,66.878 86.803,66.878 v1(87.973,65.708)
ADC5: P6.13 U1.92 | length 47.4
  Top Layer w0.152: U1.92@75,39.4 75,40.648 73.693,41.955 72.505,41.955 70.212,44.247 70.212,47.179 69.785,47.607 69.785,49.138 70.674,50.027 71.717,50.027 73.898,47.846 73.898,44.695 74.435,44.157 75.197,44.157 77.231,46.191 77.231,48.552 77.536,48.857 77.536,49.729 79.2,51.393 79.2,53.03 79.294,53.124 79.294,53.168 79.332,53.206 79.332,53.232 79.795,53.695 79.795,59.501 77.763,61.533 77.763,64.017 P6.13@76.24,65.54
ADC6: P6.11 U1.91 | length 34.7
  Top Layer w0.152: v1(70.905,52.11) 69.453,50.658 69.453,46.898 69.863,46.488 69.863,43.702 72.048,41.518 73.586,41.518 74.5,40.603 U1.91@74.5,39.4
  Bottom Layer w0.152: v1(70.905,52.11) 71.161,51.854 73.724,51.854 74.054,52.184 74.054,57.164 73.499,57.719 73.499,58.83 72.9,59.429 72.9,60.684 74.715,62.498 74.715,64.525 P6.11@73.7,65.54
ADC7: P6.9 U1.90 | length 32.4
  Top Layer w0.152: P6.9@71.16,65.54 70.041,64.421 70.041,62.371 66.333,58.663 66.333,53.787 67.857,52.263 67.857,44.693 71.54,41.01 73.467,41.01 74,40.476 U1.90@74,39.4
AREF: C4.2 P6.22 U1.98 | length 54.3
  Top Layer w0.152: v1(72.987,42.966) 76.975,42.966 78,41.941 78,38.089 81.115,38.089 82.593,39.566 82.593,43.705 84.277,45.389 84.277,46.207 84.993,46.923 85.693,46.923 86.4,47.63 P6.22@86.4,63
  Bottom Layer w0.152: C4.2@66,51.35 66.333,51.35 66.333,50.763 66.875,50.22 71.828,50.22 72.987,49.062 v1(72.987,42.966)
BATT_CHG: F2.1 P2.2 U2.3 | length 40.2
  Top Layer w0.4: U2.3@137.2,48.75 139.771,48.75 140.196,48.325 140.196,36.514 151,25.71 P2.2@151,23
  Bottom Layer w0.4: P2.2@151,23 151,19.767 151.55,19.217 F2.1@151.55,16
BATT_IN: U1.97
BATT_SW: C11.1 D5.1 L1.1 P5.10 pad.S2 U4.6 U4.7 U6.2 | length 208.6
  Top Layer w0.7: U4.6@122.05,21.565 U4.7@122.05,22.835 123.305,22.835 123.864,23.394
  Top Layer w0.8: 123.864,23.394 123.864,26.379
  Top Layer w1: U6.2@28.716,6.366 v1(31.331,6.366) ; 123.864,26.379 124.684,27.2 L1.1@128.7,27.2 ; D5.1@125.5,6 125.5,14.579 127.621,16.7 C11.1@128.8,16.7 128.8,18.438 130.645,20.283 130.645,25.255 L1.1@128.7,27.2 ; pad.S2@137,27 132.928,27 132.728,27.2 L1.1@128.7,27.2
  Bottom Layer w1: v1(31.331,6.366) 34.788,2.91 122.41,2.91 D5.1@125.5,6 ; pad.S2@137,27 pad.S2@143,27 143,31.419 144.692,33.11 148.095,33.11 151.448,36.463 151.448,43.448 150.196,44.7 144.438,44.7 144.438,65.292 142.53,67.2 139.2,67.2 P5.10@137.54,65.54
BUZZER: B1.1 U1.57 | length 56.3
  Top Layer w0.152: B1.1@48.7,12.1 51.524,14.924 51.524,34.279 55.385,38.14 v1@55.385,43.645 ; v1(63.164,49.461) 63.703,50 U1.57@65.4,50
  Bottom Layer w0.152: v1(55.172,43.645) 55.317,43.5 61.39,43.5 61.622,43.732 63.264,43.732 67.12,47.588 67.12,49.461 v1(63.164,49.461)
CELL_ENABLE: U6.1
CELL_RX: P11.20 U1.13 | length 68.8
  Top Layer w0.152: P11.20@19.5,48.539 19.5,49.341 19.708,49.549 31.301,49.549 v1(31.636,49.214) ; v1(78.601,49.468) 77.837,48.704 77.837,47.512 78.349,47 U1.13@80.6,47
  Bottom Layer w0.152: v1(31.636,49.214) 52.798,49.214 56.1,52.516 67.472,52.516 67.7,52.288 67.7,51.704 68.519,50.885 75.263,50.885 75.756,51.377 76.692,51.377 v1(78.601,49.468)
CELL_TX: P11.19 U1.12 | length 76.2
  Top Layer w0.152: P11.19@19.5,54 19.5,53.202 19.266,52.968 19.266,51.594 19.673,51.188 v1(21.532,51.188) ; v1(70.879,48.833) 70.879,47.131 74.273,43.738 75.381,43.738 78.144,46.5 U1.12@80.6,46.5
  Bottom Layer w0.152: v1(21.532,51.188) 31.792,40.928 59.287,40.928 61.759,43.4 63.401,43.4 67.452,47.451 67.452,48.252 68.033,48.833 v1(70.879,48.833)
GND: B1.2 C1.1 C2.1 C3.2 C4.1 C5.1 C6.1 C7.1 C8.2 C9.1 C10.2 C11.2 C12.1 C13.1 C14.2 C15.1 C16.1 C17.2 C18.1 C19.1 L2.2 P1.6 P2.1 P3.4 P4.1 P4.5 P5.14 P5.16 P6.7 P7.5 P8.6 P9.6 P9.COM P9.S1 P9.S2 P9.S3 P9.S4 P10.4 P11.9 P11.11 P11.13 P11.15 P11.17 P11.S1 P11.S2 P11.S3 P11.S4 P12.6 pad.0@3.999,3.998 pad.0@3.999,64.998 pad.0@150.999,3.998 pad.0@150.999,64.998 R5.1 R6.1 R7.1 R12.1 R13.1 R16.1 R18.1 R20.1 R22.1 U1.11 U1.32 U1.62 U1.81 U1.99 U2.2 U3.2 U4.4 U5.3 U5.28 U6.3 U6.6 | length 332.8
  Top Layer w0.152: C8.2@10,9.2 C8.2@10,10.403 ; U6.6@14.762,8.066 U6.6@18.416,8.066 ; U6.3@28.716,8.066 31.458,8.066 32.347,7.177 32.347,3.621 33.518,2.45 R16.1@35,2.45 ; B1.2@48.7,4.6 58.496,4.6 60,3.096 P9.S2@60,1.5 ; C3.2@49.65,52 49.65,58.005 53,61.355 P3.4@53,62 ; C2.1@52.35,33 52.35,29.478 53.328,28.5 P9.S4@61.4,28.5 61.4,20.594 60.11,19.303 ; P9.COM@58.6,19.1 59.906,19.1 60.11,19.303 ; v1(60.11,20.207) 60.11,19.303 ; v1(60.999,47.284) 61.215,47.5 U1.62@65.4,47.5 ; v1(66.663,10.987) 66.9,11.224 P9.6@66.9,12.9 ; U1.81@69.5,39.4 69.5,38.165 69.828,37.837 71.766,37.837 v1(72.175,37.428) ; v1(75.883,56.682) 76,56.565 U1.32@76,54.6 ; v1(78.118,44.794) v1@78.5,45.176 ; U1.99@78.5,39.4 v1@78.5,45.176 ; U1.11@80.6,46 79.324,46 v1@78.5,45.176 ; v1(80.709,31.18) 80.709,29.631 81.84,28.5 P9.S3@83.6,28.5 ; P9.S1@86.2,1.5 86.2,2.249 104.204,2.249 106.515,4.561 106.515,7.812 105.423,8.904 v1(90.005,8.904) C13.1@90.005,14.65 ; C13.1@90,14.65 C13.1@90.005,14.65 ; U3.2@96,14.8 96,15.711 ; C17.2@97.65,38 97.65,37.708 98.159,37.708 98.159,30.266 94.476,26.583 94.476,22.722 94.748,22.45 R22.1@95.7,22.45 ; C12.1@102.2,17.25 101.893,17.25 101.893,16.626 100.978,15.711 96,15.711 ; v1(104.052,50.89) 104.361,51.2 U5.3@105.75,51.2 ; v1(109.65,57.471) 110.4,56.721 U5.28@110.4,54.25 ; C16.1@119.65,39 119.65,37.962 ; v1(127.242,8.218) 127.242,9.209 128.8,10.767 C11.2@128.8,11.7 ; U2.2@137.2,47.8 133.125,47.8 132.125,48.8 C10.2@129,48.8 129,46.609 131.45,44.159 R18.1@131.45,42 131.23,40.629 131.222,40.636 125.898,40.636 124.931,39.669 124.931,38.791 123.746,37.606 120.006,37.606 119.65,37.962 ; L2.2@145.7,64.8 148.29,62.21 P10.4@148.29,54.25 ; C13.1@90.005,14.65 93.053,14.65 94.115,15.711 96,15.711 ; R22.1@95.7,22.45 95.7,23.331 95.954,23.585 105.086,23.585 108.471,20.2 C14.2@109,20.2 112.916,20.2 113.011,20.295 U4.4@116.95,20.295 118.428,20.295 119.495,21.362 119.495,27.294 122.35,30.149 C15.1@122.35,31 122.35,33.644 119.65,36.344 119.65,37.962 ; R22.1@95.7,22.45 95.7,18.755 96,18.455 96,15.711
  Top Layer w0.2: 17,56.174 P11.9@17,54 P11.11@17.5,54 P11.13@18,54 P11.15@18.5,54 P11.17@19,54
  Top Layer w0.4: P11.S3@5,23 8.65,19.35 C9.1@8.65,13 8.65,11.753 C8.2@10,10.403 ; C8.2@10,9.2 13.628,9.2 U6.6@14.762,8.066 ; 17,56.174 20,59.174 P7.5@20,62 ; U6.6@18.416,8.066 U6.3@28.716,8.066
  Bottom Layer w0.152: C1.1@50.25,20.1 C1.1@50.25,20.207 ; v1(60.999,47.284) 65.063,47.284 65.698,47.919 65.698,48.65 C4.1@66,48.65 ; v1(72.175,37.428) 72.35,37.604 C5.1@72.35,39 ; v1(80.709,31.18) v1@80.912,31.383 ; C19.1@109.65,54.548 C19.1@109.65,55 ; R20.1@124.45,10 124.45,9.793 125.667,9.793 v1(127.242,8.218)
  other v1: 95.7,19.9 112.9,20.3 119.8,36.1
GPS_RX: P4.3 U1.64 | length 55.4
  Top Layer w0.152: v1(63.539,45.81) 64.228,46.5 U1.64@65.4,46.5
  Bottom Layer w0.152: P4.3@33,62 33,63.514 30.646,63.514 30.138,63.006 30.138,49.112 32.424,46.826 41.06,46.826 42.076,45.81 v1(63.539,45.81)
GPS_TX: P4.4 U1.63 | length 52.2
  Top Layer w0.152: v1(59.424,64.759) 59.906,64.276 59.906,46.799 60.313,46.393 62.072,46.393 62.679,47 U1.63@65.4,47
  Bottom Layer w0.152: P4.4@35,62 35,60.794 35.794,60 42.638,60 46.812,64.174 59.291,64.174 v1@59.065,64.4 ; v1@59.265,64.6 v1(59.424,64.759)
HEATER_CONTROL: P5.12 U1.55 | length 88.6
  Top Layer w0.152: U1.55@65.4,51 64.021,51 63.43,51.591 63.43,55.224 64.391,56.184 64.391,60.124 v1(65.723,61.457) ; v1(131.7,67.6) 132.46,66.84 P5.12@132.46,65.54
  Bottom Layer w0.152: v1(65.723,61.457) 65.074,62.106 65.074,63.5 65.596,64.022 66.587,64.022 67.429,64.864 67.429,66.287 69.016,67.874 116.726,67.874 117.05,67.55 117.02,67.52 118.231,66.309 118.969,66.309 120.76,68.1 128.06,68.1 128.56,67.6 v1(131.7,67.6)